# Altium PCB 7A SCR BASED SSS SOLAR CHARGE CONRTOL.PcbDoc
Units mm, origin at the board's own origin, x right, y up, seen from the top; angles counter-clockwise.
Board outline 72.39 x 44.32 mm, 2 copper layers (Top Layer, Bottom Layer); 41 components, 24 nets, 92 pads, 0 vias.
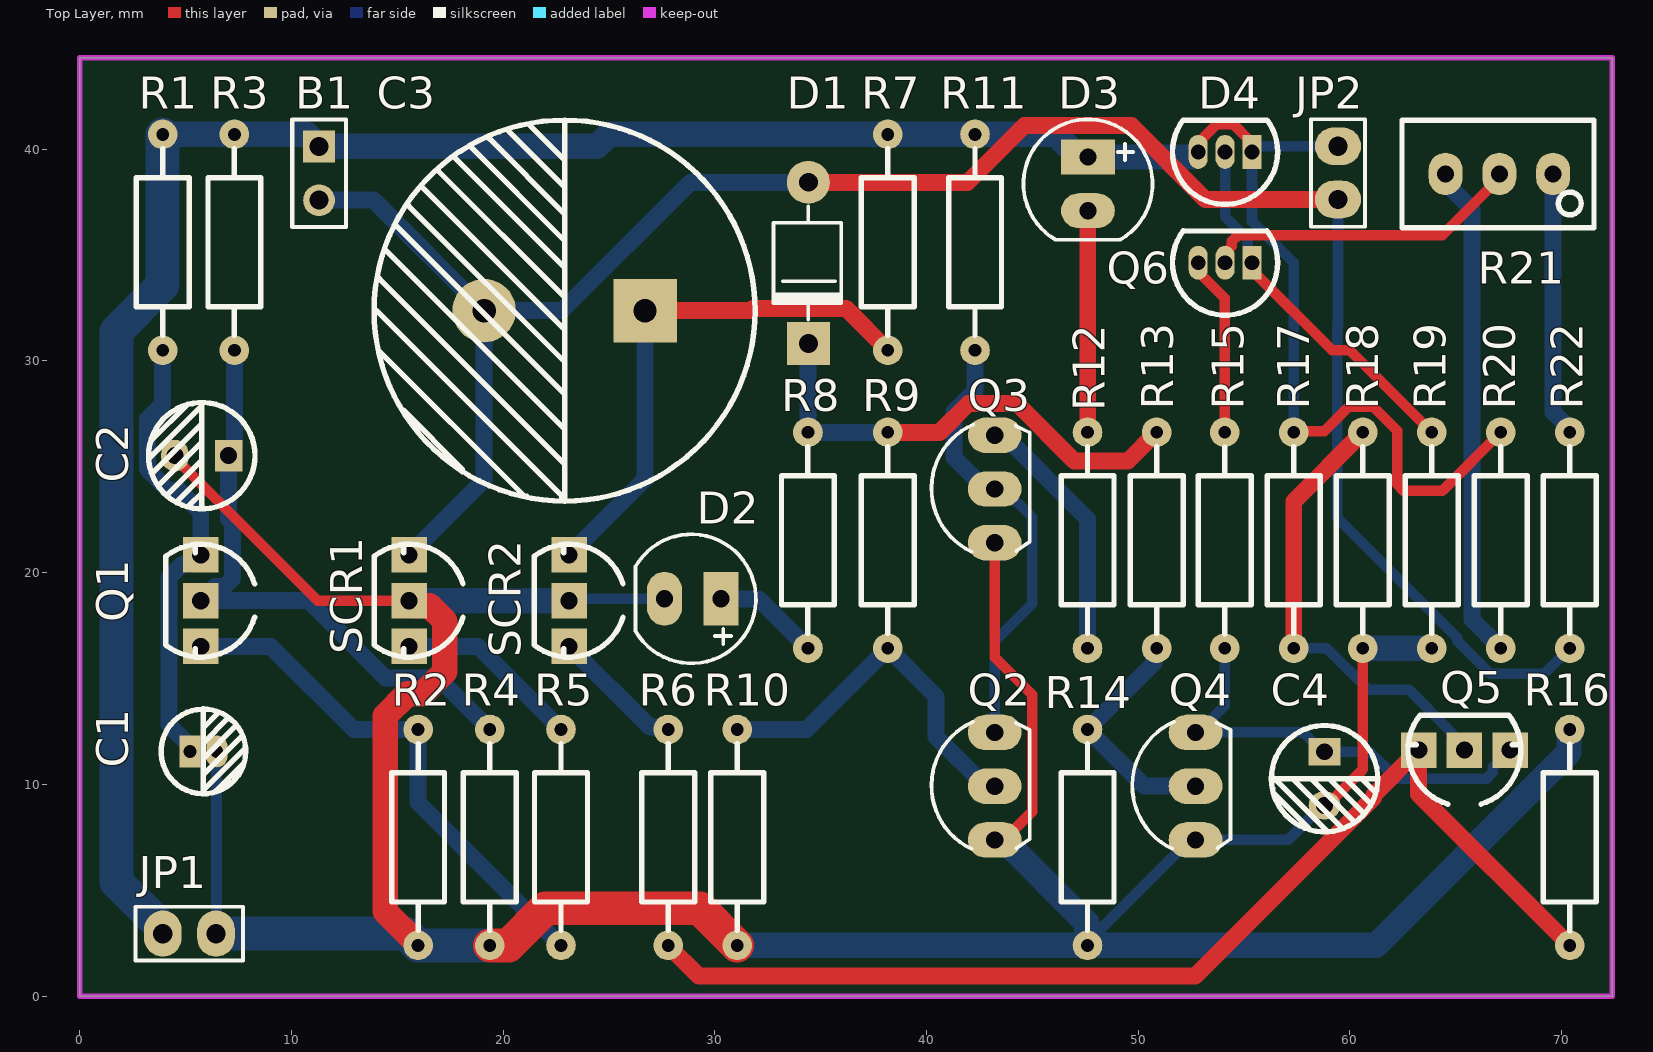
[diagram p0: Top Layer view]
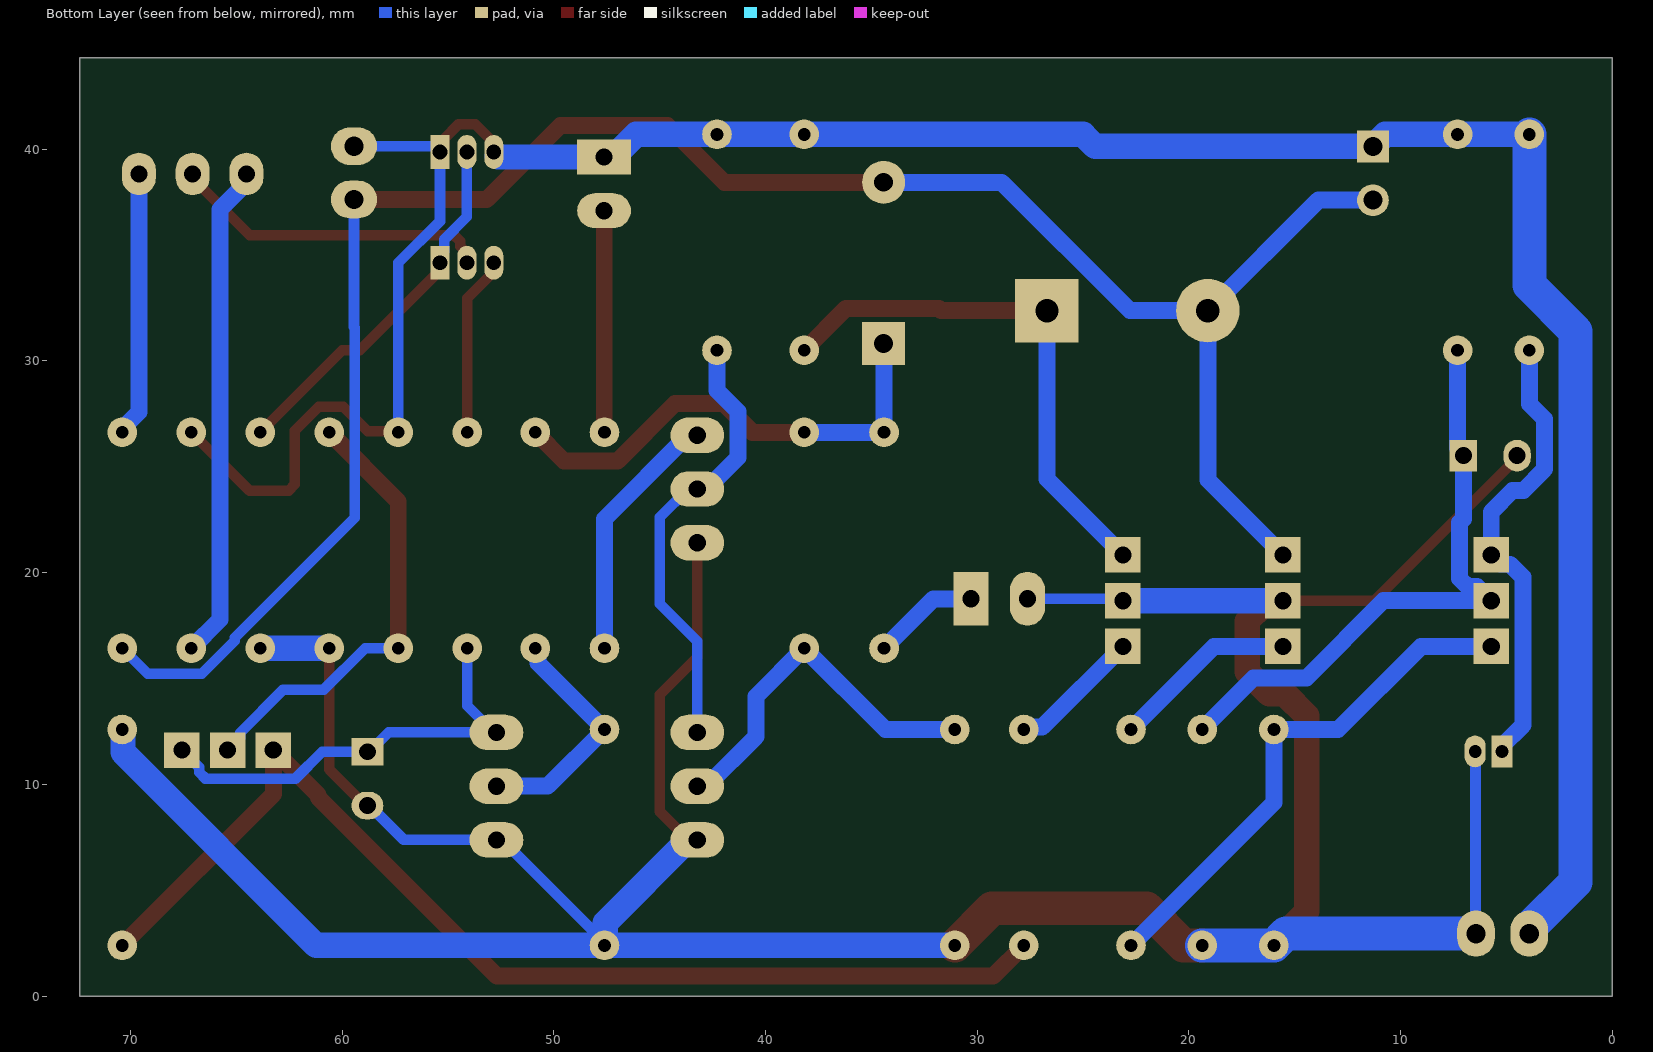
[diagram p1: Bottom Layer view, seen from below]
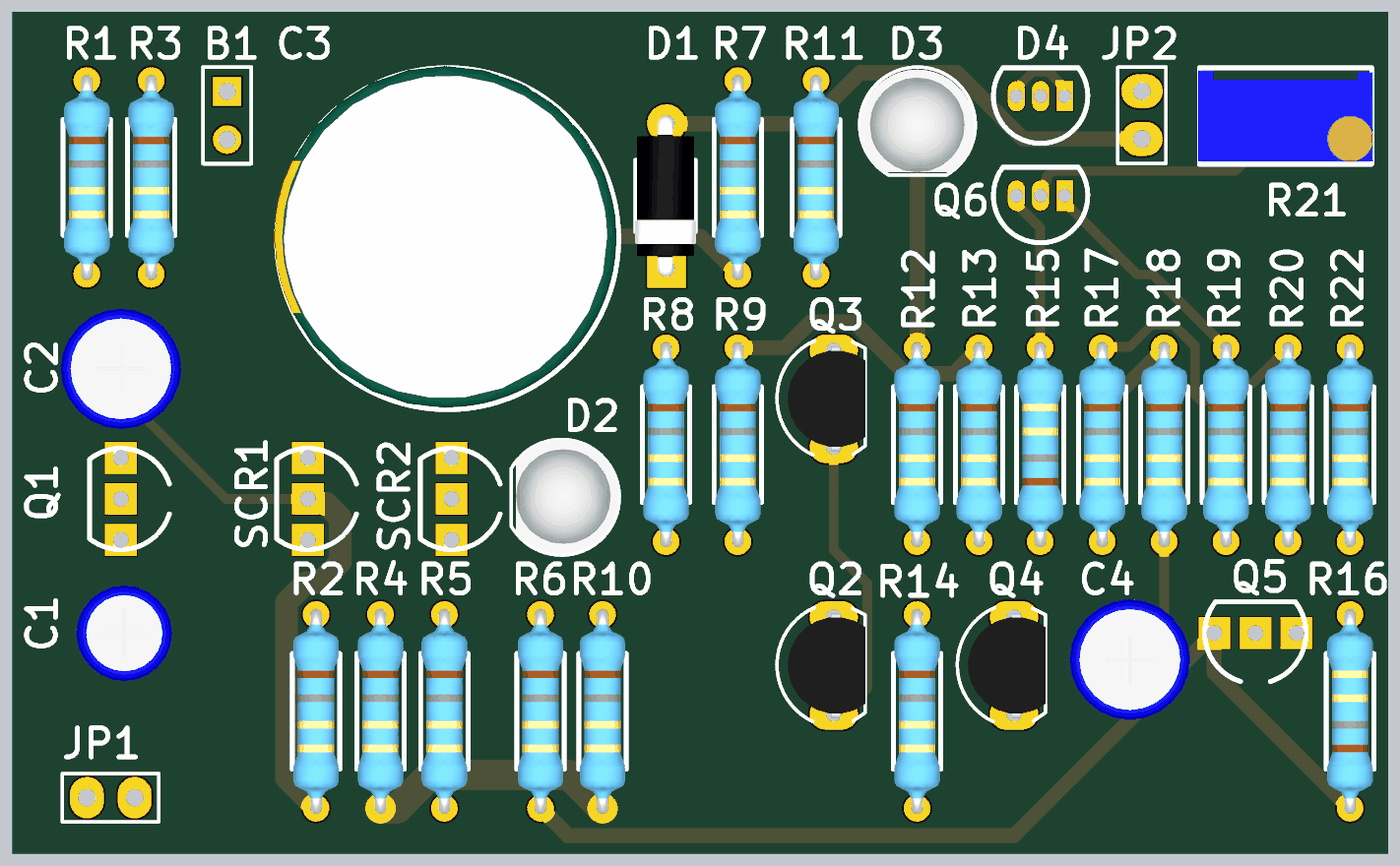
[diagram p2: 3D render of the assembled board from above, using the file's embedded part models]

## Layer stack, top to bottom
Top Solder: solder mask 0.0102, Solder Resist, Dk 3.5
Top Layer: signal copper 0.0356
Dielectric 1: dielectric 0.32, FR-4, Dk 4.8
Bottom Layer: signal copper 0.0356
Bottom Solder: solder mask 0.0102, Solder Resist, Dk 3.5

## Board outline
0,0 0,44.323 72.39,44.323 72.39,0

## Design rules (kind name [scope] priority, off if disabled: settings)
Clearance [All] p1: gap=0.254 ignorepadtopadclearanceinfootprint=FALSE except(0: Arc-Hole Track-Hole SMDPad-Hole THPad-Hole Via-Hole Fill-Hole Poly-Hole Region-Hole Text-Hole)
HoleToHoleClearance [All] p1: gap=0.1 allowstackedmicrovias=TRUE
MinimumSolderMaskSliver [All] p1: minsoldermaskwidth=0.05
PolygonConnect [All] p1: connectstyle=Relief reliefconductorwidth=0.254 reliefentries=4 polygonreliefangle="90 Angle" airgapwidth=0.254
RoomDefinition "7A SCR BASED SSS SOLAR CHARGE CONTROL" [InComponentClass('7A SCR BASED SSS SOLAR CHARGE CONTROL')] p1: confinementstyle=ConfineIn formatcopy=TRUE lockcomponents=FALSE outline 72.517,0 0,0 0,44.45 72.517,44.45
RoutingVias [All] p1: holewidth=0.711 width=1.27 viastyle="Through Hole" minholewidth=0.711 minwidth=1.27 maxholewidth=0.711 maxwidth=1.27
SilkToSilkClearance [All] p1: silktosilkclearance=0.05
SilkToSolderMaskClearance [IsPad] p1: minsilkscreentomaskgap=0.05 clearancetoexposedcopper=TRUE
SolderMaskExpansion [All] p1: expansion=0.102 istentingtop=FALSE
Width GND [InNet('GND')] p1: maxlimit=1.6 minlimit=0.5 preferedwidth=1.2
Width 15v [InNet('vcc-15v')] p2: maxlimit=1.6 minlimit=0.5 preferedwidth=1.2
Width [All] p3: maxlimit=0.8 minlimit=0.3 preferedwidth=0.5
26 further rules are at their usual default settings.

## Components (designator, comment, footprint, x,y, rotation, side; value= is the part's Value field where it differs from the comment)
B1 "Battery12V" HDR1X2 11.303,40.134 r270 top
C1 "10uF" "tu hoa 4mm" 5.842,11.557 r0 top
C2 "0.1uF" "tu hoa 5mm" 5.766,25.527 r180 top
C3 "68uF" "tu hoa 18mm" 22.903,32.377 r0 top
C4 "0.47uF" "tu hoa 5mm" 58.801,10.27 r270 top
D1 "100v" "DIODE 1A" 34.417,39.708 r90 top
D2 "" LED-5MM-Green 30.163,18.766 r180 top
D3 "LED 5mm" LED-5MM-RED 47.625,39.637 r270 top
D4 "TL431" TO-92-3_L4.9-W3.7-P1.27-L 54.102,39.397 r180 top
JP1 "Jumper 2" J2 6.439,2.95 r180 top value="JP 2"
JP2 "Jumper 2" J2 59.436,40.145 r270 top value="JP 2"
Q1 "2N6027" "TO92-INLINE - duplicate" 6.159,18.677 r270 top
Q2 "" TO92 43.218,9.915 r90 top value=C9014
Q3 "" TO92 43.218,23.952 r90 top value=C9014
Q4 "" TO92 52.705,9.915 r90 top value=C9014
Q5 "2N6027" "TO92-INLINE - duplicate" 65.405,11.172 r180 top
Q6 "" TO-92-3_L4.9-W3.7-P1.27-L 54.102,34.163 r180 top
R1 "1M" "tro vach 1/4w" 3.917,35.602 r90 top
R2 "1k" "tro vach 1/4w" 15.982,7.493 r90 top
R3 "100k" "tro vach 1/4w" 7.306,35.602 r90 top
R4 "100k" "tro vach 1/4w" 19.371,7.493 r90 top
R5 "47k" "tro vach 1/4w" 22.733,7.493 r90 top
R6 "47k" "tro vach 1/4w" 27.793,7.493 r90 top
R7 "3.3k" "tro vach 1/4w" 38.173,35.602 r90 top
R8 "10k" "tro vach 1/4w" 34.397,21.53 r90 top
R9 "100k" "tro vach 1/4w" 38.173,21.53 r90 top
R10 "100k" "tro vach 1/4w" 31.055,7.493 r90 top
R11 "100k" "tro vach 1/4w" 42.291,35.602 r90 top
R12 "10k" "tro vach 1/4w" 47.605,21.53 r90 top
R13 "100k" "tro vach 1/4w" 50.867,21.53 r90 top
R14 "100k" "tro vach 1/4w" 47.605,7.493 r90 top
R15 "100k" "tro vach 1/4w" 54.082,21.53 r270 top
R16 "1k" "tro vach 1/4w" 70.385,7.493 r270 top
R17 "100k" "tro vach 1/4w" 57.344,21.53 r90 top
R18 "100k" "tro vach 1/4w" 60.606,21.53 r90 top
R19 "10k" "tro vach 1/4w" 63.861,21.53 r90 top
R20 "18k" "tro vach 1/4w" 67.123,21.53 r90 top
R21 "10K" "Bien Tro Vi Chinh Dung" 67.056,38.837 r180 top
R22 "62k" "tro vach 1/4w" 70.385,21.53 r90 top
SCR1 "S2800A" "TO92-INLINE - duplicate" 16.002,18.677 r270 top
SCR2 "S2800A" "TO92-INLINE - duplicate" 23.558,18.677 r270 top

## Footprints (in the part's own frame and the unit in brackets; to place one, negate y for a bottom-side part, rotate by r counter-clockwise, add the part's x,y. Pads: shape width x height; smd on the part's side, far side on the other; paste and mask are expansions set on the pad)
"Bien Tro Vi Chinh Dung" [mm] "Bien tro vi chinh"
  oval 1.6x2 hole 0.8: 1(-2.54,0) 2(0,0) 3(2.54,0)
  silkscreen extent -4.47,-2.54 4.6,2.54, body extent -4.54,-2.4 4.66,2.4, height 12.02
"DIODE 1A" [mil] "Diode 1A"
  round 80 hole 35: 1(-50,0)
  rect 80x80 hole 35: 2(-350,0)
  silkscreen extent -305,-61 -95,65, body extent -366,-61 -34,65, height 122
HDR1X2 [mm] "Connector; Header; 2 Position"
  rect 1.5x1.5 hole 0.9: 1(0,0)
  round 1.5 hole 0.9: 2(2.54,0)
  silkscreen extent -1.27,-1.27 3.81,1.27, body extent -1.27,-1.27 3.81,1.27, height 7
J2 [mil] "Jum select vdd or gnd"
  oval 70x86 hole 36: 1(0,0) 2(99,0)
  silkscreen extent -50,-50 150,50
LED-5MM-Green [mil] "LED 2 PIN, 5 ly , Only colour,pin to pin 100mil"
  rect 65x100 hole 32: 1(-5,0)
  oval 65x100 hole 32: 2(100,0)
  silkscreen extent -70,-120 154,120, body extent -69,-120 145,117, height 339
LED-5MM-RED [mil] "LED 2 PIN, 5 ly , Only colour,pin to pin 100mil"
  rect 65x100 hole 32: 1(0,0)
  oval 65x100 hole 32: 2(100,0)
  silkscreen extent -70,-120 154,120, body extent -65,-119 149,118, height 339
TO92 [mil] "TO-92"
  oval 66x100 hole 32: 1(-100,0) 2(0,0) 3(100,0)
  silkscreen extent -117,-65 120,118, body extent -109,-66 109,95, height 245
"TO92-INLINE - duplicate" [mil]
  rect 66x66 hole 32 paste+0 mask+2: 1(-85,-17.5) 2(0,-17.5) 3(85,-17.5)
  silkscreen extent -105,-83 105,83
TO-92-3_L4.9-W3.7-P1.27-L [mm]
  rect 0.9x1.6 hole 0.7 paste+0 mask+0.051: 1(-1.27,-0.478)
  oval 0.9x1.6 hole 0.7 paste+0 mask+0.051: 2(0,-0.478) 3(1.27,-0.478)
  silkscreen extent -2.48,-1.98 2.48,2
"tro vach 1/4w" [mm]
  round 1.4 hole 0.6: 1(-5.1,0) 2(5.1,0)
  silkscreen extent -4.39,-1.25 4.42,1.25, body extent -5.38,-1.2 5.38,1.2, height 2.41
"tu hoa 4mm" [mm]
  rect 1x1.5 hole 0.6: 1(-0.635,0)
  oval 1x1.5 hole 0.6: 2(0.635,0)
  silkscreen extent -2,-2 2.01,2.01, body extent -2.47,-2.47 2.58,2.58, height 14.81
"tu hoa 5mm" [mm]
  rect 1.3x1.5 hole 0.8: 1(-1.27,0)
  oval 1.3x1.5 hole 0.8: 2(1.27,0)
  silkscreen extent -2.51,-2.51 2.51,2.51, body extent -3.12,-3.18 3.23,3.18, height 14.55
"tu hoa 18mm" [mm]
  rect 3x3 hole 1.1: 1(3.8,0)
  round 3 hole 1.1: 2(-3.8,0)
  silkscreen extent -9,-9 9,9, body extent -9.12,-8.91 8.89,9.09, height 2

## Part data
B1: library part Battery9V, "Multicell Battery", LatestRevisionDate=17-Jul-2002, LatestRevisionNote="Re-released for DXP Platform.", PackageReference=BAT-2, Published=24-Mar-1999, Publisher="Altium Limited"
C1: library part "Tu Hoa 10uF 16V 4x7", "Cắm", Chung_Loai=Cắm, Don_Vi=Con, Ma_Hang=MH006855, So_Chan=2, Ten_Linh_Kien="Tụ Hóa 10uF 16V"
C2: library part "Tu Hoa 0.1uF 50V 5x11", "Cắm", Chung_Loai=Cắm, Don_Vi=Con, Ma_Hang=MH006853, So_Chan=2, Ten_Linh_Kien="Tụ Hóa 0.1uF 50V"
C3: library part "Tu Hoa 68uF 400V 18x26", "Cắm", Chung_Loai=Cắm, Don_Vi=Con, Ma_Hang=MH007269, So_Chan=2, Ten_Linh_Kien="Tụ Hóa 68uF 400V"
C4: library part "Tu Hoa 0.47uF 50V 5x11", "Cắm", Chung_Loai=Cắm, Don_Vi=Con, Ma_Hang=MH006969, So_Chan=2, Ten_Linh_Kien="Tụ Hóa 0.47uF50V 5x11MM"
D1: library part "Diode 1N4007", "Cắm", Chung_Loai=Cắm, Don_Vi=Con, Ma_Hang=MH001063, Ten_Linh_Kien="Diode 1N4007 1A (DIP)"
D2: library part "LED 5mm Xanh La", "Cắm", Chung_Loai=Cắm, Don_Vi=Con, Ma_Hang=MH008969, Ten_Linh_Kien="LED 5MM Phủ Xanh (1000c)"
D3: library part "LED 5mm Do", "Cắm", Chung_Loai=Cắm, Don_Vi=Con, Ma_Hang=MH008967, Ten_Linh_Kien="Led 5MM Phủ Đỏ (1000c)"
D4: library part TL431CLPMTL431CLPM
JP1 JP2: library part "JP 2_1"
Q2 Q3 Q4: library part "Trans 2N3904", "NPN transistor EBC"
Q5: library part 2N6027RLRA_YK
Q6: library part 2N3906
R1: library part "Tro Vach 1/4W 5% 1M", "Cắm", Chung_Loai=Cắm, Don_Vi=Con, Ma_Hang=MH007392, So_Chan=2, Ten_Linh_Kien="Trở Vạch 1/4w 5% 1M"
R2 R16: library part "Tro Vach 1/4W 5% 1k", "Cắm", Chung_Loai=Cắm, Don_Vi=Con, Ma_Hang=MH007390, So_Chan=2, Ten_Linh_Kien="Trở Vạch 1/4w 5% 1k"
R3 R4 R9 R10 R11 R13 R14 R15 R17 R18: library part "Tro Vach 1/4W 5% 100k", "Cắm", Chung_Loai=Cắm, Don_Vi=Con, Ma_Hang=MH007352, So_Chan=2, Ten_Linh_Kien="Trở Vạch 1/4w 5% 100k"
R5 R6: library part "Tro Vach 1/4W 5% 47k", "Cắm", Chung_Loai=Cắm, Don_Vi=Con, Ma_Hang=MH004982, So_Chan=2, Ten_Linh_Kien="Trở Vạch 1/4w 5% 47k"
R7: library part "Tro Vach 1/4W 5% 3.3k", "Cắm", Chung_Loai=Cắm, Don_Vi=Con, Ma_Hang=MH007306, So_Chan=2, Ten_Linh_Kien="Trở vạch 1/4w 5% 3.3k"
R8 R12 R19: library part "Tro Vach 1/4W 5% 10k", "Căm", Chung_Loai=Cắm, Don_Vi=Con, Ma_Hang=MH007354, So_Chan=2, Ten_Linh_Kien="Trở Vạch 1/4w 5% 10K"
R20: library part "Tro Vach 1/4W 5% 18k", "Cắm", Chung_Loai=Cắm, Don_Vi=Con, Ma_Hang=MH007291, So_Chan=2, Ten_Linh_Kien="Trở Vạch 1/4w 5% 18k"
R21: library part "Bien Tro Tinh Chinh 10K Dung", "Cắm", Chung_Loai=Cắm, Don_Vi=Con, Ma_Hang=MH003232, Ten_Linh_Kien="Biến Trở VR 103-10K 3296W"
R22: library part "Tro Vach 1/4W 5% 68k", "Cắm", Chung_Loai=Cắm, Don_Vi=Con, Ma_Hang=MH007332, So_Chan=2, Ten_Linh_Kien="Trở Vạch 1/4w 5% 68k"
SCR1 SCR2: library part SCR

## Nets (pads, with @x,y where several pads share a name; then routed paths per layer and width w, separated by ;. In a path a pad name is that pad's centre, name@x,y a point inside that pad or via, vN(x,y) a via of type N, cw(c..) or ccw(c..) an arc to the next point about the centre after c; other vN are vias at no path point)
+2.5: Q5.2 R17.1 R18.2 | length 21.7
  Top Layer w0.8: R17.1 57.344,23.368 R18.2
  Bottom Layer w0.5: R17.1 58.903,16.43 60.873,14.461 62.791,14.461 64.817,12.435 64.817,12.205 Q5.2
GND: C1.2 C2.2 C4.2 D2.2 JP1.1 Q2.1 Q3.1 Q4.1 R2.1 R4.1 R10.1 R14.1 R16.1 R18.1 R19.1 SCR1.2 SCR2.2 | length 173.3
  Top Layer w0.5: C2.2 4.496,25.427 11.246,18.677 SCR1.2 ; Q2.1 43.65,7.375 44.992,8.717 44.992,14.227 43.218,16.001 Q3.1 ; C4.2 58.901,9 60.606,10.705 R18.1
  Top Layer w1.2: JP1.1 JP1.1@6.549,3.061 ; SCR1.2 15.796,18.439 16.521,18.439 17.25,17.71 17.25,15.326 16.205,14.281 15.473,14.281 14.428,13.237 14.428,4.001 15.982,2.447 R2.1
  Top Layer w1.6: R4.1 20.252,2.393 22.006,4.147 29.301,4.147 R10.1
  Bottom Layer w0.5: JP1.1 6.458,2.969 6.458,11.538 C1.2 ; SCR2.2 23.203,18.766 D2.2 ; Q2.1 Q2.1@43.65,7.375 ; R14.1 47.605,2.55 52.43,7.375 Q4.1 57.076,7.375 58.701,9 C4.2
  Bottom Layer w1.2: SCR1.2 SCR2.2 ; R10.1 R14.1 ; Q2.1@43.65,7.375 47.567,3.458 47.567,2.431 R14.1 ; R18.1 R19.1 ; R16.1 70.347,12.555 70.347,11.515 61.225,2.393 R14.1
  Bottom Layer w1.6: JP1.1 15.425,2.95 R2.1 R4.1
NetB1_2: B1.2 C3.2 D1.1 JP2.2 R22.1 SCR1.1 | length 98
  Top Layer w0.8: D1.1 41.942,38.438 44.62,41.116 49.68,41.116 53.166,37.63 JP2.2
  Bottom Layer w0.5: JP2.2 59.436,31.603 59.402,31.569 59.402,22.592 65.065,16.929 65.065,16.786 66.624,15.226 69.181,15.226 R22.1
  Bottom Layer w0.8: B1.2 13.886,37.594 C3.2 ; SCR1.1 19.103,24.381 C3.2 ; D1.1 28.839,38.438 22.778,32.377 C3.2
NetC1_1: C1.1 Q1.1 R1.1 | length 21.9
  Bottom Layer w0.8: R1.1 3.917,27.976 3.192,27.251 3.192,24.887 4.199,23.88 4.709,23.88 5.715,22.874 Q1.1 5.277,20.398 4.834,20.398 4.223,19.786 4.223,12.791 5.207,11.807 C1.1
NetC2_1: C2.1 Q1.2 R3.1 R4.2 | length 29.1
  Bottom Layer w0.8: R3.1 7.306,25.897 7.036,25.627 C2.1 7.036,22.537 7.207,22.366 7.207,19.727 6.824,19.344 6.382,19.344 Q1.2 10.797,18.677 14.448,15.026 16.938,15.026 R4.2
NetC3_1: C3.1 R7.1 SCR2.1 | length 25.4
  Top Layer w0.8: C3.1 31.698,32.377 31.809,32.488 36.187,32.488 R7.1
  Bottom Layer w0.8: SCR2.1 26.703,24.424 C3.1
NetC4_1: C4.1 Q4.3 Q5.1 R15.2 | length 21
  Bottom Layer w0.5: Q4.3 Q4.3@52.818,12.455 ; R15.2 54.082,13.718 Q4.3@52.818,12.455 ; Q5.1 66.747,10.8 66.747,10.57 66.452,10.274 62.199,10.274 60.933,11.54 C4.1 58.701,11.54 57.786,12.455 Q4.3@52.818,12.455
NetD1_2: D1.2 R8.2 R9.2 R13.2 | length 22.9
  Top Layer w0.8: R9.2 40.624,26.63 41.978,27.984 44.268,27.984 46.976,25.276 49.513,25.276 R13.2
  Bottom Layer w0.8: D1.2 34.407,30.808 34.407,26.64 R8.2 R9.2
NetD2_1: D2.1 R8.1 | length 5.1
  Bottom Layer w0.8: D2.1 32.062,18.766 R8.1
NetD3_2: D3.2 R12.2 | length 10.5
  Top Layer w0.8: R12.2 47.615,26.64 47.615,37.087 D3.2
NetD4_2: D4.2 Q6.1 R19.2 | length 17.8
  Top Layer w0.5: Q6.1 55.372,34.291 59.155,30.508 59.984,30.508 R19.2
  Bottom Layer w0.5: D4.2 54.102,36.807 55.172,35.737 55.172,35.191 55.372,34.991 Q6.1
NetQ1_3: Q1.3 R2.2 R5.1 | length 24.9
  Bottom Layer w0.8: Q1.3 9.024,16.518 12.949,12.593 R2.2 15.982,9.144 R5.1
NetQ2_2: Q2.2 R9.1 R10.2 | length 17.8
  Bottom Layer w0.8: R10.2 34.335,12.593 R9.1 40.453,14.15 40.453,12.248 42.786,9.915 Q2.2 Q2.2@43.434,9.915
NetQ2_3: Q2.3 Q3.2 R11.1 | length 21.7
  Top Layer w0.8: Q3.2@43.002,23.952 Q3.2 Q3.2@43.434,23.952
  Bottom Layer w0.5: Q2.3 43.218,16.758 44.992,18.532 44.992,22.61 43.65,23.952 Q3.2
  Bottom Layer w0.8: R11.1 42.288,30.499 42.288,28.602 41.294,27.608 41.294,25.444 42.786,23.952 Q3.2
NetQ3_3: Q3.3 R12.1 | length 12.1
  Bottom Layer w0.8: Q3.3 43.65,26.492 47.605,22.537 R12.1
NetQ4_2: Q4.2 R13.1 R14.2 | length 11.4
  Bottom Layer w0.8: R13.1 50.752,16.316 50.752,15.74 R14.2 50.283,9.915 Q4.2
NetQ5_3: Q5.3 R6.1 R16.2 | length 52.7
  Top Layer w0.8: R6.1 29.247,0.939 52.684,0.939 61.124,9.379 61.124,9.495 Q5.3 63.246,9.532 R16.2
NetQ6_3: Q6.3 R15.1 | length 8.5
  Top Layer w0.5: Q6.3 52.832,34.212 54.082,32.962 R15.1
NetR5_2: R5.2 SCR1.3 | length 8.8
  Bottom Layer w0.8: SCR1.3 18.808,16.518 R5.2
NetR6_2: R6.2 SCR2.3 | length 6.3
  Bottom Layer w0.8: SCR2.3 26.924,12.708 27.678,12.708 R6.2
NetR20_1: R20.1 R21.3 | length 23.5
  Bottom Layer w0.8: R21.3 64.516,38.42 65.769,37.167 65.769,17.784 R20.1
NetR21_1: R21.1 R22.2 | length 12.5
  Bottom Layer w0.8: R21.1 69.596,27.582 70.385,26.793 R22.2
vcc-3.1v: Q6.2 R21.2 | length 15.2
  Top Layer w0.5: Q6.2 54.102,35.099 54.418,35.415 54.418,35.65 54.713,35.945 64.364,35.945 67.056,38.637 R21.2
vcc-15v: B1.1 D3.1 D4.1 D4.3 JP1.2 JP2.1 R1.2 R3.2 R7.2 R11.2 R17.2 R20.2 | length 126.6
  Top Layer w0.5: D4.3 52.832,40.305 53.707,41.179 54.497,41.179 55.172,40.505 55.172,40.075 D4.1 ; R17.2 57.394,26.68 58.794,26.68 59.948,27.834 61.105,27.834 62.23,26.709 62.23,24.169 62.523,23.876 64.369,23.876 R20.2
  Bottom Layer w0.5: D4.3@52.647,39.637 52.832,39.821 D4.3 D4.3@52.832,40.305 ; D4.1 55.372,36.604 57.344,34.632 R17.2 ; D4.1@55.572,40.145 JP2.1
  Bottom Layer w1.2: R1.2 R3.2 10.735,40.702 B1.1 24.427,40.134 24.995,40.702 R7.2 R11.2 46.115,40.702 47.18,39.637 D3.1 52.643,39.637 D4.3@52.682,39.675
  Bottom Layer w1.6: R1.2 3.917,33.583 1.738,31.404 1.738,5.388 3.924,3.202 JP1.2

## Keep-outs
Top Layer:
  the board outline again, w0.254